# Altium PCB mppt.PcbDoc (part 5 of 6)
Units mm, origin at the board's own origin, x right, y up, seen from the top; angles counter-clockwise.
Board outline 161 x 166 mm, 6 copper layers (Top Layer, Layer 1, Layer 2, Layer 3, Layer 4, Bottom Layer), stack 0.815 mm thick; 460 components, 230 nets, 1421 pads, 2551 vias.
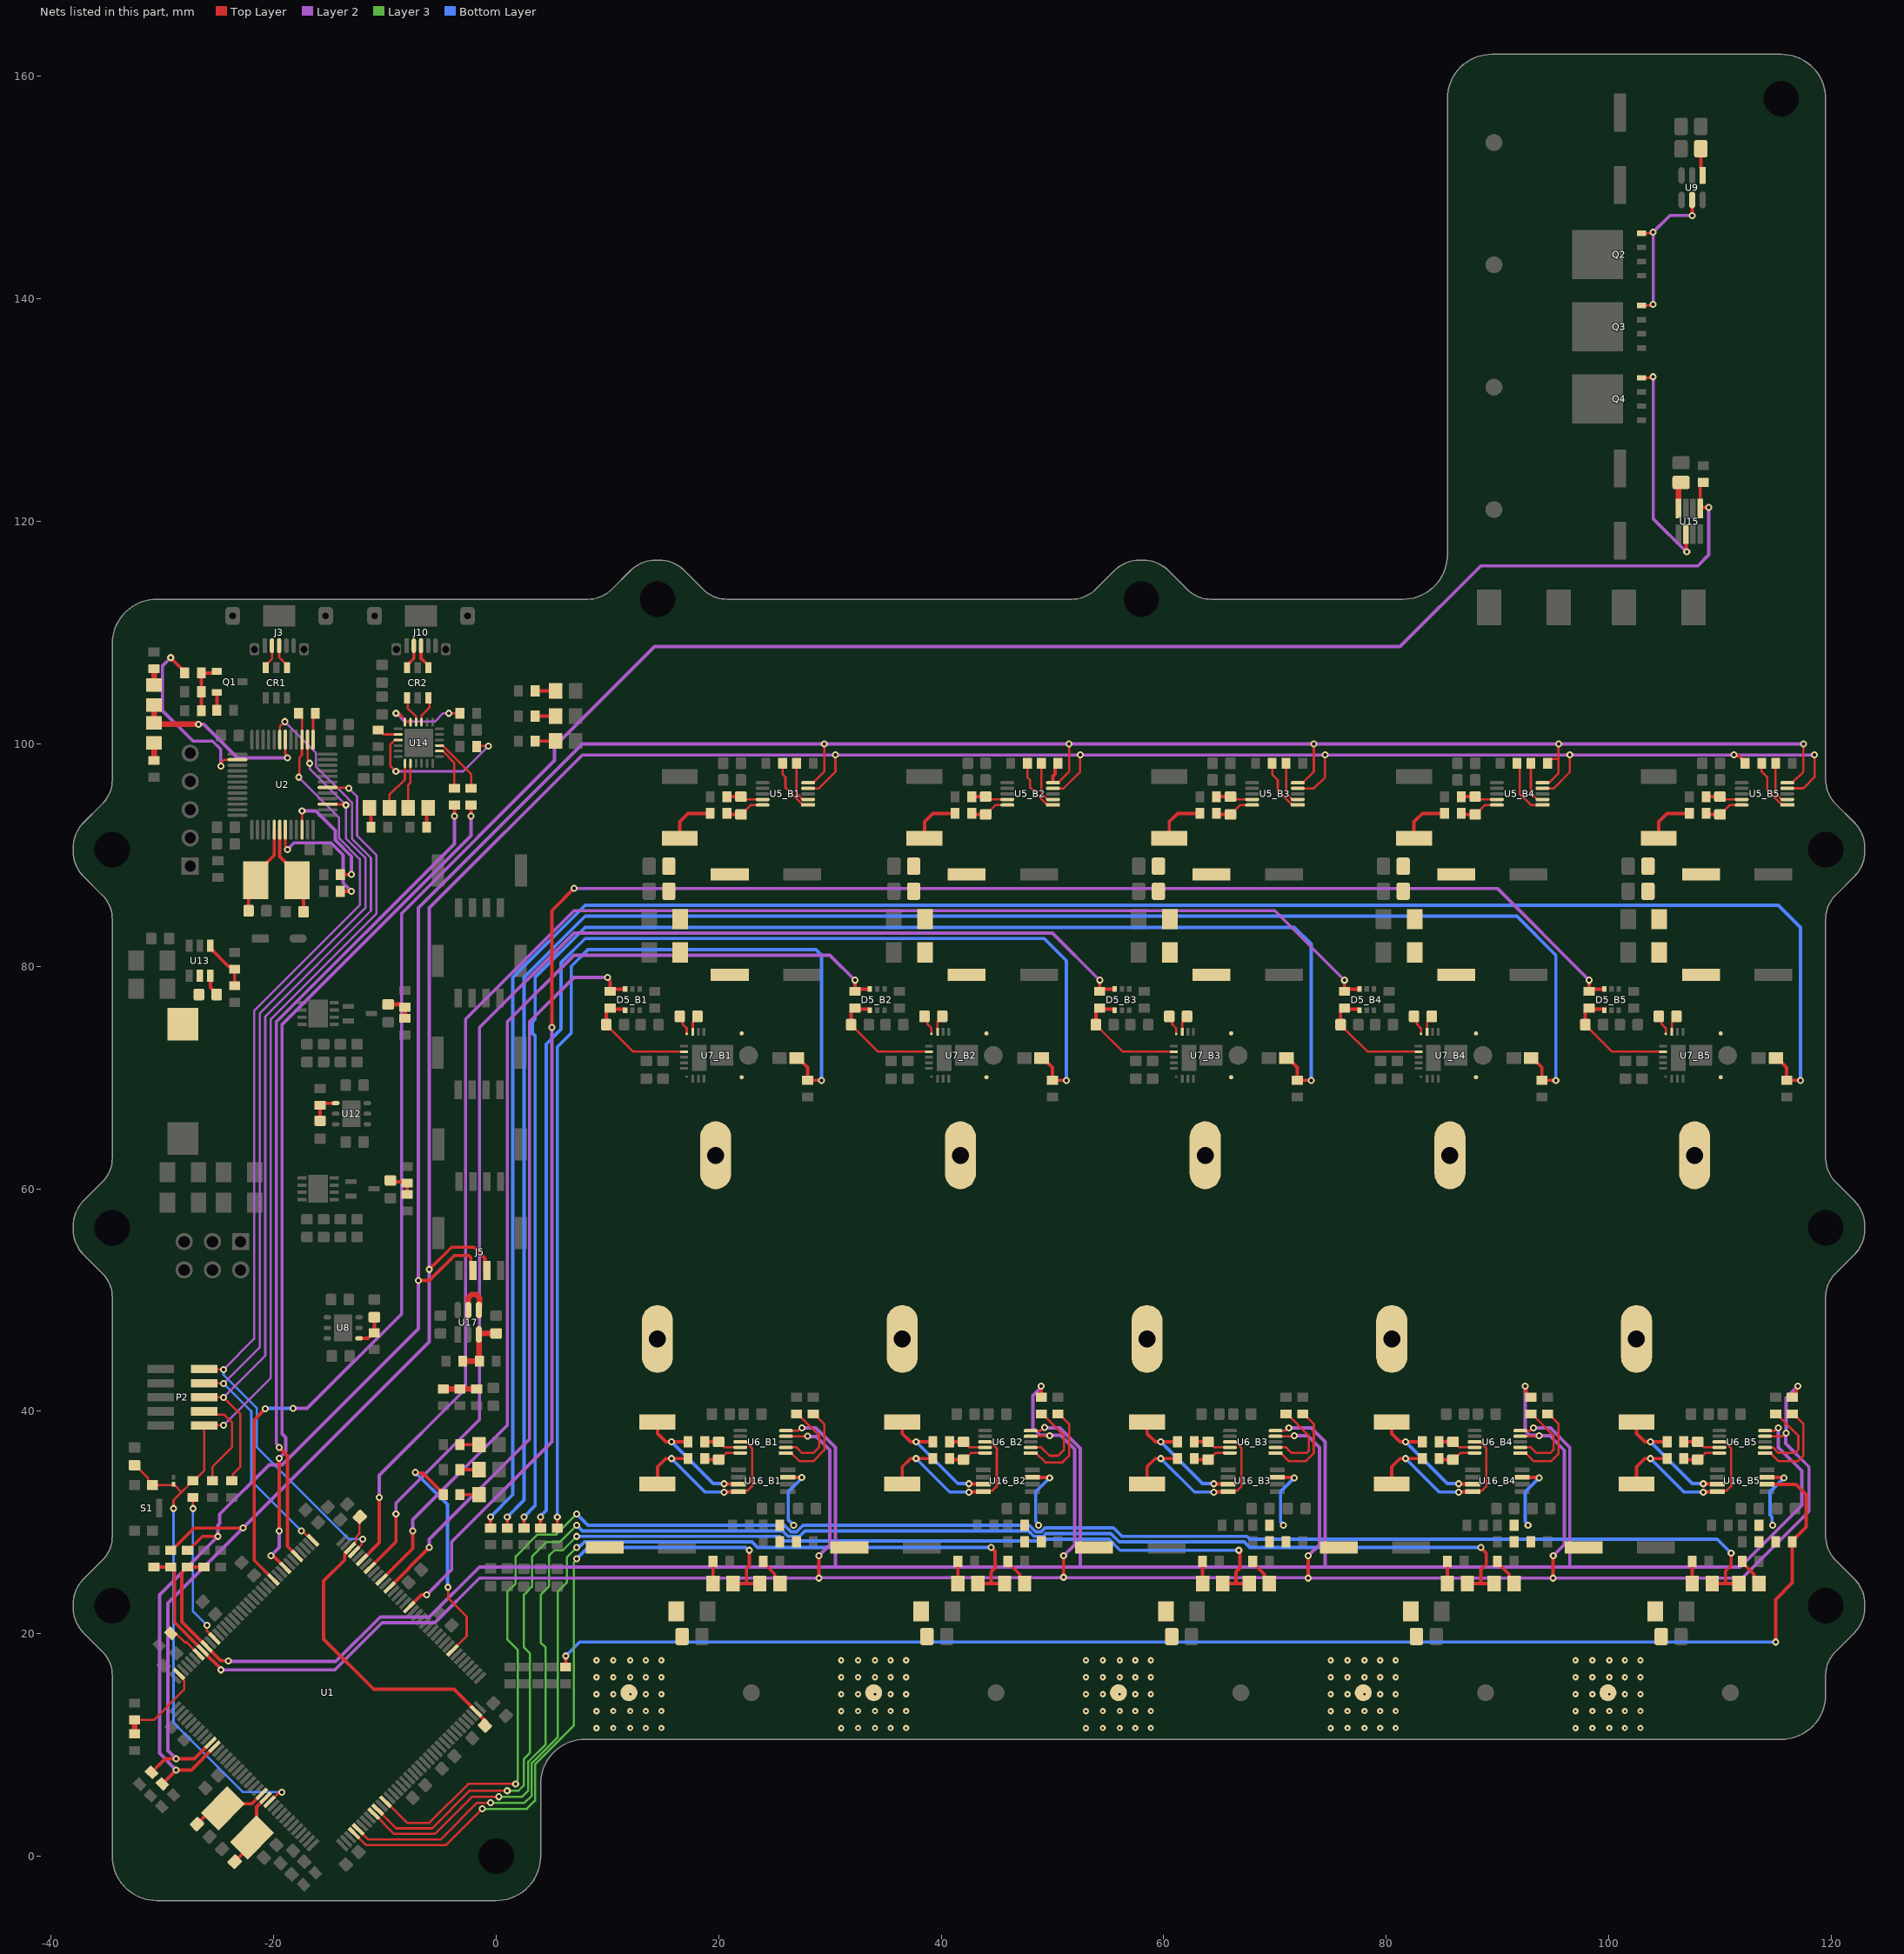
[diagram p8: the nets of this part, all layers, seen from the top]

## Via types
v1: diameter 0.635, hole 0.305, Top Layer to Bottom Layer, tented both sides, 2197 vias
v2: diameter 0.559, hole 0.203, Top Layer to Bottom Layer, tented both sides, 350 vias
v3: diameter 0.5, hole 0.2, Top Layer to Bottom Layer, 4 vias

## Nets (pads, with @x,y where several pads share a name; then routed paths per layer and width w, separated by ;. In a path a pad name is that pad's centre, name@x,y a point inside that pad or via, vN(x,y) a via of type N, cw(c..) or ccw(c..) an arc to the next point about the centre after c; other vN are vias at no path point) (continued)
I_IND_5: R20.1 R83_B5.2 U16_B5.2 | length 128.6
  Top Layer w0.3: R20.1@6.25,17 v1(6.25,18) ; U16_B5.2@114.217,33.426 114.218,33.425 116.825,33.425 117.75,32.5 117.75,29.6 116.5,28.35 R83_B5.2@116.5,28.25 116.5,24.575 115,23.075 v1(115,19.25)
  Bottom Layer w0.3: v1(6.25,18) 7.5,19.25 v1(115,19.25)
INJECT_EN: R71.2 U1.119 U15.1 | length 206.9
  Top Layer w0.3: v1@-20.75,40.25 -20.75,40.21 -21.75,39.21 -21.75,26.603 U1.119@-20.011,24.865 ; U15.1@108.225,121.25 108.225,123.225 R71.2@108.25,123.25 ; U15.1@108.25,121.25 v1(109,121.25)
  Layer 2 w0.3: v1(-18.25,40.25) -17,40.25 -8.5,48.75 -8.5,84.75 5.25,98.5 5.25,99.75 14.25,108.75 81.25,108.75 88.5,116 108,116 109,117 v1(109,121.25)
  Bottom Layer w0.3: v1@-20.75,40.25 v1(-18.25,40.25)
  other v1: -20.74,40.22
LED: D2.K D3.A U2.30 | length 16.6
  Top Layer w0.203: U2.30@-18.95,100.375 -18.95,99.067 -18.75,98.867 v1(-18.75,98.75)
  Top Layer w0.5: D3.A@-30.75,103.5 D2.K@-30.75,101.9 -30.626,101.776 -26.776,101.776 v1(-26.75,101.75)
  Layer 2 w0.3: v1(-26.75,101.75) -26.25,101.75 -23.25,98.75 v1(-18.75,98.75)
LED_TOG_1: D1_B1.K D4_B1.A U1.40 | length 63.2
  Top Layer w0.203: U1.40@-12.764,2.06 -11.703,1 -4.5,1 v1(-1.25,4.25)
  Top Layer w0.3: D4_B1.A@21.3,24.5 22.5,24.5 ; v1(22.75,27.5) 22.75,26.125 22.5,25.875 22.5,24.5 ; D1_B1.K@23.7,24.5 22.5,24.5
  Layer 3 w0.2: v1(-1.25,4.25) 2.75,4.25 3.5,5 3.5,8.25 7,11.75 7,26.415 7.25,26.665 v1(7.25,26.75)
  Bottom Layer w0.3: v1(7.25,26.75) 8.25,27.75 8.75,27.75 22.409,27.75 22.659,27.5 v1(22.75,27.5)
LED_TOG_2: D1_B2.K D4_B2.A U1.41 | length 85.3
  Top Layer w0.203: U1.41@-12.5,2.5 -11.5,1.5 -5,1.5 -1.704,4.796 -0.502,4.796 v1(-0.5,4.794)
  Top Layer w0.3: D4_B2.A@43.3,24.5 44.5,24.5 ; v1(44.5,27.75) 44.845,27.406 44.845,25.92 44.5,25.576 44.5,24.5 ; D1_B2.K@45.7,24.5 44.5,24.5
  Layer 3 w0.2: v1(-0.5,4.794) 2.544,4.794 3.198,5.448 3.198,8.375 5.544,10.721 5.544,23.795 6.346,24.596 6.346,26.846 v1(7.25,27.75)
  Bottom Layer w0.3: v1(7.25,27.75) 7.341,27.75 7.492,27.902 7.584,27.902 7.932,28.25 23,28.25 23.5,27.75 v1(44.5,27.75)
LED_TOG_3: D1_B3.K D4_B3.A U1.45 | length 107.5
  Top Layer w0.203: U1.45@-10.996,3.828 -9.168,2 -5.5,2 -2.159,5.341 0.248,5.341 v1(0.25,5.339)
  Top Layer w0.3: D4_B3.A@65.3,24.5 66.5,24.5 ; v1(66.75,27.5) 66.844,27.405 66.844,25.92 66.5,25.576 66.5,24.5 ; D1_B3.K@67.7,24.5 66.5,24.5
  Layer 3 w0.2: v1(0.25,5.339) 2.339,5.339 2.897,5.897 2.897,8.5 4.456,10.059 4.456,18.75 4,19.206 4,23.5 4.75,24.25 4.75,27 5.25,27.5 6,27.5 v1(7.25,28.75)
  Bottom Layer w0.3: v1(7.25,28.75) 25.5,28.75 25.898,28.352 49.329,28.352 49.477,28.5 55.08,28.5 56.08,27.5 v1(66.75,27.5)
LED_TOG_4: D1_B4.K D4_B4.A U1.46 | length 130.8
  Top Layer w0.203: U1.46@-10.75,4.25 -9,2.5 -5.75,2.5 -2.365,5.885 0.998,5.885 v1(1,5.883)
  Top Layer w0.3: D4_B4.A@87.3,24.5 88.5,24.5 ; v1(88.5,27.75) 89,27.25 89,26.25 88.5,25.75 88.5,24.5 ; D1_B4.K@89.7,24.5 88.5,24.5
  Layer 3 w0.2: v1(1,5.883) 2.016,5.883 2.5,6.367 2.5,8.75 3.044,9.295 3.044,18.226 2.5,18.77 2.5,23.5 3.229,24.229 3.229,26.924 4.555,28.25 5.75,28.25 v1(7.25,29.75)
  Bottom Layer w0.3: v1(7.25,29.75) 7.75,29.25 25.75,29.25 26.246,28.754 27.254,28.754 27.75,29.25 47.841,29.25 48.337,28.754 49.163,28.754 49.409,29 55.25,29 56,28.25 67.25,28.25 67.75,27.75 v1(88.5,27.75)
LED_TOG_5: D1_B5.K D4_B5.A U1.48 | length 153.7
  Top Layer w0.203: U1.48@-10,5 -8,3 -6,3 -2.5,6.5 v1(1.75,6.5)
  Top Layer w0.3: D4_B5.A@109.3,24.5 110.5,24.5 ; v1(111,27.25) 111,26.125 110.5,25.625 110.5,24.5 ; D1_B5.K@111.7,24.5 110.5,24.5
  Layer 3 w0.2: v1(1.75,6.5) 1.75,6.618 1.956,6.823 1.956,18.544 1,19.5 1,23.75 1.75,24.5 1.75,26.945 3.714,28.909 5.409,28.909 v1(7.25,30.75)
  Bottom Layer w0.3: v1(7.25,30.75) 8.25,29.75 25.909,29.75 26.504,29.155 26.996,29.155 27.591,29.75 47.909,29.75 48.504,29.155 48.996,29.155 49.341,29.5 55.5,29.5 56.25,28.75 67.5,28.75 67.75,28.5 109.75,28.5 v1(111,27.25)
LI_1: D5_B1.3 R7_B1.2 U1.96 | length 67.5
  Top Layer w0.3: U1.96@-9.582,24.158 -9.582,24.163 -6,27.745 v1(-6,27.75) ; v1(10,79) 10,78.909 10.25,78.659 R7_B1.2@10.25,77.75 10.45,77.95 D5_B1.3@11.6,77.95
  Layer 2 w0.3: v1(-6,27.75) -6,28.5 3,37.5 3,75 7,79 v1(10,79)
LI_2: D5_B2.3 R7_B2.2 U1.98 | length 91.9
  Top Layer w0.3: U1.98@-10.289,24.865 -7.5,27.653 v1(-7.5,29.25) ; v1(32.25,78.75) R7_B2.2@32.25,77.75 32.45,77.95 D5_B2.3@33.6,77.95
  Layer 2 w0.3: v1(-7.5,29.25) -7.5,30.25 1,38.75 1,75 7,81 30,81 v1(32.25,78.75)
LI_3: D5_B3.3 R7_B3.2 U1.101 | length 116.1
  Top Layer w0.3: U1.101@-11.349,25.925 -9,28.275 v1(-9,30.75) ; v1(54.25,78.75) R7_B3.2@54.25,77.75 54.45,77.95 D5_B3.3@55.6,77.95
  Layer 2 w0.3: v1(-9,30.75) -9,31.75 -1.5,39.25 -1.5,74.5 7,83 50,83 v1(54.25,78.75)
LI_4: D5_B4.3 R7_B4.2 U1.103 | length 140.5
  Top Layer w0.3: U1.103@-12.056,26.632 -10.5,28.189 v1(-10.5,32.25) ; v1(76.25,78.75) R7_B4.2@76.25,77.75 76.45,77.95 D5_B4.3@77.6,77.95
  Layer 2 w0.3: v1(-10.5,32.25) -10.5,34.25 -2.75,42 -2.75,75.25 7,85 70,85 v1(76.25,78.75)
LI_5: D5_B5.3 R7_B5.2 U1.91 | length 168.1
  Top Layer w0.3: U1.91@-7.814,22.39 -6.704,23.5 v1(-6.25,23.5) ; v1(5,74.5) 5,85 v1(7,87) ; v1(98.25,78.75) R7_B5.2@98.25,77.75 98.45,77.95 D5_B5.3@99.6,77.95
  Layer 2 w0.3: v1(-6.25,23.5) -4,25.75 -4,28.25 5,37.25 v1(5,74.5) ; v1(7,87) 90,87 v1(98.25,78.75)
LI_IN_B1: C28_B1.2 D5_B1.4 R7_B1.1 U7_B1.13 | length 11.2
  Top Layer w0.203: C28_B1.2@9.9,74.75 9.9,74.719 10.293,74.327 10.323,74.327 12.325,72.325 U7_B1.13@16.9,72.325
  Top Layer w0.3: C28_B1.2@9.9,74.75 9.9,76 10.15,76.25 R7_B1.1@10.25,76.25 10.35,76.15 11.55,76.15 11.6,76.1 D5_B1.4@11.6,76.05
LI_IN_B2: C28_B2.2 D5_B2.4 R7_B2.1 U7_B2.13 | length 11.2
  Top Layer w0.203: C28_B2.2@31.9,74.75 31.9,74.719 32.293,74.327 32.323,74.327 34.325,72.325 U7_B2.13@38.9,72.325
  Top Layer w0.3: C28_B2.2@31.9,74.75 31.9,76 32.15,76.25 R7_B2.1@32.25,76.25 32.35,76.15 33.55,76.15 33.6,76.1 D5_B2.4@33.6,76.05
LI_IN_B3: C28_B3.2 D5_B3.4 R7_B3.1 U7_B3.13 | length 11.2
  Top Layer w0.203: C28_B3.2@53.9,74.75 53.9,74.719 54.293,74.327 54.323,74.327 56.325,72.325 U7_B3.13@60.9,72.325
  Top Layer w0.3: C28_B3.2@53.9,74.75 53.9,76 54.15,76.25 R7_B3.1@54.25,76.25 54.35,76.15 55.55,76.15 55.6,76.1 D5_B3.4@55.6,76.05
LI_IN_B4: C28_B4.2 D5_B4.4 R7_B4.1 U7_B4.13 | length 11.2
  Top Layer w0.203: C28_B4.2@75.9,74.75 75.9,74.719 76.293,74.327 76.323,74.327 78.325,72.325 U7_B4.13@82.9,72.325
  Top Layer w0.3: C28_B4.2@75.9,74.75 75.9,76 76.15,76.25 R7_B4.1@76.25,76.25 76.35,76.15 77.55,76.15 77.6,76.1 D5_B4.4@77.6,76.05
LI_IN_B5: C28_B5.2 D5_B5.4 R7_B5.1 U7_B5.13 | length 11.2
  Top Layer w0.203: C28_B5.2@97.9,74.75 97.9,74.719 98.293,74.327 98.323,74.327 100.325,72.325 U7_B5.13@104.9,72.325
  Top Layer w0.3: C28_B5.2@97.9,74.75 97.9,76 98.15,76.25 R7_B5.1@98.25,76.25 98.35,76.15 99.55,76.15 99.6,76.1 D5_B5.4@99.6,76.05
NetC1_1: C1.1 C2.1 U1.71 U1.106 | length 30.3
  Top Layer w0.203: U1.106@-13.117,27.693 -13.117,27.801 -12.546,28.372 -12.546,28.726 -12.287,28.985 -12.287,30.463 C1.1@-12.25,30.5
  Top Layer w0.3: U1.106@-13.117,27.693 -13.117,27.654 -13.617,27.154 -13.617,26.633 -15.5,24.75 -15.5,19.5 -11,15 -3.783,15 U1.71@-1.803,13.021 -1.803,12.981 -1.009,12.187 C2.1@-1.009,11.741
NetC19_2: C19.2 R2.1 R3.2 | length 2.6
  Top Layer w0.381: C19.2@-9.698,76.575 -8.548,76.575 -8.298,76.325 R2.1@-8.198,76.325 R3.2@-8.198,75.325
NetC26_B1_1: C26_B1.1 U7_B1.11 | length 1.8
  Top Layer w0.203: C26_B1.1@16.5,75.5 16.75,75.25 16.75,74.811 17.125,74.436 U7_B1.11@17.125,73.925
NetC26_B1_2: C26_B1.2 U7_B1.10 | length 1.6
  Top Layer w0.203: U7_B1.10@17.675,74.1 17.675,75.001 18.1,75.426 C26_B1.2@18.1,75.5
NetC26_B2_1: C26_B2.1 U7_B2.11 | length 1.8
  Top Layer w0.203: C26_B2.1@38.5,75.5 38.75,75.25 38.75,74.811 39.125,74.436 U7_B2.11@39.125,73.925
NetC26_B2_2: C26_B2.2 U7_B2.10 | length 1.6
  Top Layer w0.203: U7_B2.10@39.675,74.1 39.675,75.001 40.1,75.426 C26_B2.2@40.1,75.5
NetC26_B3_1: C26_B3.1 U7_B3.11 | length 1.8
  Top Layer w0.203: C26_B3.1@60.5,75.5 60.75,75.25 60.75,74.811 61.125,74.436 U7_B3.11@61.125,73.925
NetC26_B3_2: C26_B3.2 U7_B3.10 | length 1.6
  Top Layer w0.203: U7_B3.10@61.675,74.1 61.675,75.001 62.1,75.426 C26_B3.2@62.1,75.5
NetC26_B4_1: C26_B4.1 U7_B4.11 | length 1.8
  Top Layer w0.203: C26_B4.1@82.5,75.5 82.75,75.25 82.75,74.811 83.125,74.436 U7_B4.11@83.125,73.925
NetC26_B4_2: C26_B4.2 U7_B4.10 | length 1.6
  Top Layer w0.203: U7_B4.10@83.675,74.1 83.675,75.001 84.1,75.426 C26_B4.2@84.1,75.5
NetC26_B5_1: C26_B5.1 U7_B5.11 | length 1.8
  Top Layer w0.203: C26_B5.1@104.5,75.5 104.75,75.25 104.75,74.811 105.125,74.436 U7_B5.11@105.125,73.925
NetC26_B5_2: C26_B5.2 U7_B5.10 | length 1.6
  Top Layer w0.203: U7_B5.10@105.675,74.1 105.675,75.001 106.1,75.426 C26_B5.2@106.1,75.5
NetC39_2: C39.2 U2.5 Y1.2 | length 8.2
  Top Layer w0.3: C39.2@-22.25,85 -22.25,87.1 Y1.2@-21.6,87.75 -21.6,88.325 -19.95,89.975 U2.5@-19.95,92.275
NetC40_1: C40.1 U2.6 Y1.1 | length 8.3
  Top Layer w0.3: U2.6@-19.45,92.275 -19.45,89.875 -17.9,88.325 Y1.1@-17.9,87.75 -17.313,87.163 C40.1@-17.313,84.9
NetC49_2: C49.2 R47.2 U8.1 | length 3
  Top Layer w0.3: U8.1@-12.325,46.55 -11.525,46.55 -11.3,46.775 -11.3,46.8 -11.05,47.05 R47.2@-10.95,47.05 C49.2@-10.95,48.45
NetC54_2: C54.2 R50.1 R51.2 | length 2.6
  Top Layer w0.3: C54.2@-9.5,60.75 -9.375,60.625 -8.125,60.625 R50.1@-8,60.5 R51.2@-8,59.5
NetC61_2: C61.2 R52.2 U12.1 | length 2.9
  Top Layer w0.3: C61.2@-15.824,66.11 R52.2@-15.824,67.51 -15.653,67.681 -14.444,67.681 U12.1@-14.425,67.7
NetC62_B1_1: C62_B1.1 R54_B1.1 U6_B1.9 | length 3.4
  Top Layer w0.203: C62_B1.1@20,37.25 20.042,37.25 20.542,36.75 U6_B1.9@21.949,36.75
  Top Layer w0.3: R54_B1.1@18.75,37.25 C62_B1.1@20,37.25
NetC62_B1_2: C62_B1.2 R53_B1.1 U6_B1.10 | length 3.5
  Top Layer w0.203: C62_B1.2@20,35.65 20.074,35.65 20.674,36.25 U6_B1.10@21.949,36.25
  Top Layer w0.3: R53_B1.1@18.75,35.75 18.85,35.65 C62_B1.2@20,35.65
NetC62_B2_1: C62_B2.1 R54_B2.1 U6_B2.9 | length 3.4
  Top Layer w0.203: C62_B2.1@42,37.25 42.042,37.25 42.542,36.75 U6_B2.9@43.949,36.75
  Top Layer w0.3: R54_B2.1@40.75,37.25 C62_B2.1@42,37.25
NetC62_B2_2: C62_B2.2 R53_B2.1 U6_B2.10 | length 3.5
  Top Layer w0.203: C62_B2.2@42,35.65 42.074,35.65 42.674,36.25 U6_B2.10@43.949,36.25
  Top Layer w0.3: R53_B2.1@40.75,35.75 40.85,35.65 C62_B2.2@42,35.65
NetC62_B3_1: C62_B3.1 R54_B3.1 U6_B3.9 | length 3.4
  Top Layer w0.203: C62_B3.1@64,37.25 64.042,37.25 64.542,36.75 U6_B3.9@65.949,36.75
  Top Layer w0.3: R54_B3.1@62.75,37.25 C62_B3.1@64,37.25
NetC62_B3_2: C62_B3.2 R53_B3.1 U6_B3.10 | length 3.5
  Top Layer w0.203: C62_B3.2@64,35.65 64.074,35.65 64.674,36.25 U6_B3.10@65.949,36.25
  Top Layer w0.3: R53_B3.1@62.75,35.75 62.85,35.65 C62_B3.2@64,35.65
NetC62_B4_1: C62_B4.1 R54_B4.1 U6_B4.9 | length 3.4
  Top Layer w0.203: C62_B4.1@86,37.25 86.042,37.25 86.542,36.75 U6_B4.9@87.949,36.75
  Top Layer w0.3: R54_B4.1@84.75,37.25 C62_B4.1@86,37.25
NetC62_B4_2: C62_B4.2 R53_B4.1 U6_B4.10 | length 3.5
  Top Layer w0.203: C62_B4.2@86,35.65 86.074,35.65 86.674,36.25 U6_B4.10@87.949,36.25
  Top Layer w0.3: R53_B4.1@84.75,35.75 84.85,35.65 C62_B4.2@86,35.65
NetC62_B5_1: C62_B5.1 R54_B5.1 U6_B5.9 | length 3.4
  Top Layer w0.203: C62_B5.1@108,37.25 108.042,37.25 108.542,36.75 U6_B5.9@109.949,36.75
  Top Layer w0.3: R54_B5.1@106.75,37.25 C62_B5.1@108,37.25
NetC62_B5_2: C62_B5.2 R53_B5.1 U6_B5.10 | length 3.5
  Top Layer w0.203: C62_B5.2@108,35.65 108.074,35.65 108.674,36.25 U6_B5.10@109.949,36.25
  Top Layer w0.3: R53_B5.1@106.75,35.75 106.85,35.65 C62_B5.2@108,35.65
NetC63_B1_1: C63_B1.1 R56_B1.1 U5_B1.9 | length 3.3
  Top Layer w0.203: C63_B1.1@22,95.25 22.24,95.01 23.939,95.01 U5_B1.9@23.949,95
  Top Layer w0.3: R56_B1.1@20.75,95.25 C63_B1.1@22,95.25
NetC63_B1_2: C63_B1.2 R55_B1.1 U5_B1.10 | length 3.6
  Top Layer w0.203: C63_B1.2@22,93.65 22.052,93.65 22.902,94.5 U5_B1.10@23.949,94.5
  Top Layer w0.3: R55_B1.1@20.75,93.75 20.85,93.65 C63_B1.2@22,93.65
NetC63_B2_1: C63_B2.1 R56_B2.1 U5_B2.9 | length 3.3
  Top Layer w0.203: C63_B2.1@44,95.25 44.24,95.01 45.939,95.01 U5_B2.9@45.949,95
  Top Layer w0.3: R56_B2.1@42.75,95.25 C63_B2.1@44,95.25
NetC63_B2_2: C63_B2.2 R55_B2.1 U5_B2.10 | length 3.6
  Top Layer w0.203: C63_B2.2@44,93.65 44.052,93.65 44.902,94.5 U5_B2.10@45.949,94.5
  Top Layer w0.3: R55_B2.1@42.75,93.75 42.85,93.65 C63_B2.2@44,93.65
NetC63_B3_1: C63_B3.1 R56_B3.1 U5_B3.9 | length 3.3
  Top Layer w0.203: C63_B3.1@66,95.25 66.24,95.01 67.939,95.01 U5_B3.9@67.949,95
  Top Layer w0.3: R56_B3.1@64.75,95.25 C63_B3.1@66,95.25
NetC63_B3_2: C63_B3.2 R55_B3.1 U5_B3.10 | length 3.6
  Top Layer w0.203: C63_B3.2@66,93.65 66.052,93.65 66.902,94.5 U5_B3.10@67.949,94.5
  Top Layer w0.3: R55_B3.1@64.75,93.75 64.85,93.65 C63_B3.2@66,93.65
NetC63_B4_1: C63_B4.1 R56_B4.1 U5_B4.9 | length 3.3
  Top Layer w0.203: C63_B4.1@88,95.25 88.24,95.01 89.939,95.01 U5_B4.9@89.949,95
  Top Layer w0.3: R56_B4.1@86.75,95.25 C63_B4.1@88,95.25
NetC63_B4_2: C63_B4.2 R55_B4.1 U5_B4.10 | length 3.6
  Top Layer w0.203: C63_B4.2@88,93.65 88.052,93.65 88.902,94.5 U5_B4.10@89.949,94.5
  Top Layer w0.3: R55_B4.1@86.75,93.75 86.85,93.65 C63_B4.2@88,93.65
NetC63_B5_1: C63_B5.1 R56_B5.1 U5_B5.9 | length 3.3
  Top Layer w0.203: C63_B5.1@110,95.25 110.24,95.01 111.939,95.01 U5_B5.9@111.949,95
  Top Layer w0.3: R56_B5.1@108.75,95.25 C63_B5.1@110,95.25
NetC63_B5_2: C63_B5.2 R55_B5.1 U5_B5.10 | length 3.6
  Top Layer w0.203: C63_B5.2@110,93.65 110.052,93.65 110.902,94.5 U5_B5.10@111.949,94.5
  Top Layer w0.3: R55_B5.1@108.75,93.75 108.85,93.65 C63_B5.2@110,93.65
NetC66_1: C66.1 U9.1 | length 2.5
  Top Layer w0.3: C66.1@108.278,153.5 108.278,151.74 108.45,151.568 U9.1@108.45,151.1
NetC68_1: C68.1 U13.6 | length 1.9
  Top Layer w0.3: U13.6@-25.686,79.162 -25.686,78.09 -25.112,77.517 C68.1@-25.112,77.464
NetC68_2: C68.2 L2.1 U13.5
NetC85_1: C85.1 U15.4 | length 2.2
  Top Layer w0.5: U15.4@106.275,121.151 106.275,122.997 C85.1@106.5,123.222
NetC93_2: C93.2 R31.1 R94.2 U17.3 | length 5.6
  Top Layer w0.5: R31.1@-3,44.5 R94.2@-1.5,44.5 -1.537,44.537 -1.537,46.886 U17.3@-1.55,46.9 -1.55,46.968 -1.518,47 C93.2@0,47
NetCR1_4: CR1.4 J3.3 | length 2.2
  Top Layer w0.203: J3.3@-19.5,108.825 -19.5,107.775 -18.8,107.075 CR1.4@-18.8,106.865
NetCR1_6: CR1.6 J3.2 | length 2.2
  Top Layer w0.203: CR1.6@-20.7,106.865 -20.7,107.075 -20.15,107.625 J3.2@-20.15,108.825
NetCR2_1: CR2.1 U14.4 | length 2.5
  Top Layer w0.203: CR2.1@-8,104.135 -7.96,104.095 -7.96,103.21 -7.2,102.45 U14.4@-7.2,101.951
NetCR2_3: CR2.3 U14.3 | length 2.6
  Top Layer w0.203: U14.3@-6.7,101.951 -6.7,102.55 -6,103.25 CR2.3@-6,104.25
NetCR2_4: CR2.4 J10.3 | length 2.2
  Top Layer w0.3: J10.3@-6.75,108.825 -6.75,107.7 -6.254,107.204 -6.229,107.204 -6.1,107.075 CR2.4@-6.1,106.865
NetCR2_6: CR2.6 J10.2 | length 2.2
  Top Layer w0.3: CR2.6@-8,106.865 -8,107.075 -7.4,107.675 J10.2@-7.4,108.825
NetD1_B1_A: D1_B1.A R45_B1.2 | length 2.6
  Top Layer w0.3: R45_B1.2@24,26.5 24,26.4 25.05,25.35 25.05,24.95 D1_B1.A@25.5,24.5
NetD1_B2_A: D1_B2.A R45_B2.2 | length 2.6
  Top Layer w0.3: R45_B2.2@46,26.5 46,26.4 47.05,25.35 47.05,24.95 D1_B2.A@47.5,24.5
NetD1_B3_A: D1_B3.A R45_B3.2 | length 2.6
  Top Layer w0.3: R45_B3.2@68,26.5 68,26.4 69.05,25.35 69.05,24.95 D1_B3.A@69.5,24.5
NetD1_B4_A: D1_B4.A R45_B4.2 | length 2.6
  Top Layer w0.3: R45_B4.2@90,26.5 90,26.4 91.05,25.35 91.05,24.95 D1_B4.A@91.5,24.5
NetD1_B5_A: D1_B5.A R45_B5.2 | length 2.6
  Top Layer w0.3: R45_B5.2@112,26.5 112,26.4 113.05,25.35 113.05,24.95 D1_B5.A@113.5,24.5
NetD2_A: D2.A R43.2 | length 1.6
  Top Layer w0.5: R43.2@-30.75,98.5 D2.A@-30.75,100.1
NetD3_K: D3.K R44.1 | length 1.4
  Top Layer w0.5: D3.K@-30.75,105.3 R44.1@-30.75,106.75
NetD4_B1_K: D4_B1.K R46_B1.1 | length 2
  Top Layer w0.3: D4_B1.K@19.5,24.5 R46_B1.1@19.5,26.5
NetD4_B2_K: D4_B2.K R46_B2.1 | length 2
  Top Layer w0.3: D4_B2.K@41.5,24.5 R46_B2.1@41.5,26.5
NetD4_B3_K: D4_B3.K R46_B3.1 | length 2
  Top Layer w0.3: D4_B3.K@63.5,24.5 R46_B3.1@63.5,26.5
NetD4_B4_K: D4_B4.K R46_B4.1 | length 2
  Top Layer w0.3: D4_B4.K@85.5,24.5 R46_B4.1@85.5,26.5
NetD4_B5_K: D4_B5.K R46_B5.1 | length 2
  Top Layer w0.3: D4_B5.K@107.5,24.5 R46_B5.1@107.5,26.5
NetD6_A: D6.A R63.1 | length 1.8
  Top Layer w0.3: R63.1@-6.25,92.5 -6.25,94.1 D6.A@-6.1,94.25
NetD6_K: D6.K U14.14 | length 4.1
  Top Layer w0.203: D6.K@-7.9,94.25 -7.9,96.301 -7.7,96.501 U14.14@-7.7,98.249
NetD7_A: D7.A R64.1 | length 1.8
  Top Layer w0.3: D7.A@-11.4,94.25 -11.25,94.1 R64.1@-11.25,92.5
NetD7_K: D7.K U14.13 | length 4.6
  Top Layer w0.203: D7.K@-9.6,94.25 -9.6,95.4 -8.2,96.8 U14.13@-8.2,98.249
NetD9_A: D9.A R68.2 | length 2
  Top Layer w0.3: R68.2@3.5,102.5 D9.A@5.5,102.5
NetD10_A: D10.A R69.2 | length 2
  Top Layer w0.3: R69.2@3.5,104.75 D10.A@5.5,104.75
NetD11_A: D11.A R70.2 | length 1.8
  Top Layer w0.3: R70.2@3.5,100.25 D11.A@5.25,100.25
NetD12_A: D12.A R75.2 | length 1.7
  Top Layer w0.3: R75.2@-3.25,37 D12.A@-1.55,37
NetD13_A: D13.A R76.1 | length 1.8
  Top Layer w0.3: R76.1@-3.25,34.75 D13.A@-1.5,34.75
NetD14_A: D14.A R77.2 | length 1.7
  Top Layer w0.3: R77.2@-3.25,32.5 D14.A@-1.55,32.5
NetL1_B1_1: L1_B1.1 U7_B1.5
NetL1_B1_2: L1_B1.2 R4_B1.2 R54_B1.2 U16_B1.7 | length 11.7
  Top Layer w0.3: R4_B1.2@14.5,39.031 14.5,38 15.25,37.25 v1(15.75,37.25) R54_B1.2@17.25,37.25 ; v1(20.5,33.48) 20.528,33.453 21.756,33.453 U16_B1.7@21.784,33.425
  Bottom Layer w0.3: v1(15.75,37.25) 19.5,33.5 20.481,33.5 v1(20.5,33.48)
NetL1_B2_1: L1_B2.1 U7_B2.5
NetL1_B2_2: L1_B2.2 R4_B2.2 R54_B2.2 U16_B2.7 | length 11.7
  Top Layer w0.3: R4_B2.2@36.5,39.031 36.5,38 37.25,37.25 v1(37.75,37.25) R54_B2.2@39.25,37.25 ; v1(42.5,33.48) 42.528,33.453 43.756,33.453 U16_B2.7@43.784,33.425
  Bottom Layer w0.3: v1(37.75,37.25) 41.5,33.5 42.481,33.5 v1(42.5,33.48)
NetL1_B3_1: L1_B3.1 U7_B3.5
NetL1_B3_2: L1_B3.2 R4_B3.2 R54_B3.2 U16_B3.7 | length 11.7
  Top Layer w0.3: R4_B3.2@58.5,39.031 58.5,38 59.25,37.25 v1(59.75,37.25) R54_B3.2@61.25,37.25 ; v1(64.5,33.48) 64.528,33.453 65.756,33.453 U16_B3.7@65.784,33.425
  Bottom Layer w0.3: v1(59.75,37.25) 63.5,33.5 64.481,33.5 v1(64.5,33.48)
NetL1_B4_1: L1_B4.1 U7_B4.5
NetL1_B4_2: L1_B4.2 R4_B4.2 R54_B4.2 U16_B4.7 | length 11.7
  Top Layer w0.3: R4_B4.2@80.5,39.031 80.5,38 81.25,37.25 v1(81.75,37.25) R54_B4.2@83.25,37.25 ; v1(86.5,33.48) 86.528,33.453 87.756,33.453 U16_B4.7@87.784,33.425
  Bottom Layer w0.3: v1(81.75,37.25) 85.5,33.5 86.481,33.5 v1(86.5,33.48)
NetL1_B5_1: L1_B5.1 U7_B5.5
NetL1_B5_2: L1_B5.2 R4_B5.2 R54_B5.2 U16_B5.7 | length 11.7
  Top Layer w0.3: R4_B5.2@102.5,39.031 102.5,38 103.25,37.25 v1(103.75,37.25) R54_B5.2@105.25,37.25 ; v1(108.5,33.48) 108.528,33.453 109.756,33.453 U16_B5.7@109.784,33.425
  Bottom Layer w0.3: v1(103.75,37.25) 107.5,33.5 108.481,33.5 v1(108.5,33.48)
NetQ1_1: Q1.1 R39.2 R40.2 R41.1 | length 4.9
  Top Layer w0.3: R39.2@-26.5,102.975 R41.1@-26.5,104.675 R40.2@-26.5,106.375 -25.65,106.375 -25.25,106.375 Q1.1@-25.1,106.525
NetQ1_2: Q1.2 R42.2 | length 1.6
  Top Layer w0.3: R42.2@-25.1,103.025 Q1.2@-25.1,104.625
NetQ2_4: Q2.4 Q3.4 U9.5 | length 14.1
  Top Layer w0.203: Q3.4@102.95,139.405 v1@103.905,139.405 ; Q2.4@102.95,145.905 103.905,145.905 ccw(c103.905,146) v1(104,146)
  Top Layer w0.3: v1(107.5,147.5) U9.5@107.5,148.9
  Layer 2 w0.3: v1(104,139.5) v1(104,146) 105.5,147.5 v1(107.5,147.5)
NetQ4_4: Q4.4 U15.6 | length 19.7
  Top Layer w0.203: Q4.4@102.95,132.905 103.905,132.905 ccw(c103.905,133) v1(104,133)
  Top Layer w0.3: U15.6@106.925,118.849 106.97,118.804 106.97,117.318 v1(107.015,117.273)
  Layer 2 w0.3: v1(104,133) 104,120.25 v1@107,117.25
NetR8_1: R8.1 R30.2 U13.1 | length 4.7
  Top Layer w0.3: U13.1@-25.686,81.862 -25.686,81.612 -24.074,80 -23.75,80 R30.2@-23.5,79.75 R8.1@-23.5,78.25
NetR11_B1_1: R11_B1.1 U5_B1.2 | length 4
  Top Layer w0.203: R11_B1.1@27,98.25 27,95.571 27.571,95 U5_B1.2@28.051,95
NetR11_B2_1: R11_B2.1 U5_B2.2 | length 4
  Top Layer w0.203: R11_B2.1@49,98.25 49,95.571 49.571,95 U5_B2.2@50.051,95
NetR11_B3_1: R11_B3.1 U5_B3.2 | length 4
  Top Layer w0.203: R11_B3.1@71,98.25 71,95.571 71.571,95 U5_B3.2@72.051,95
NetR11_B4_1: R11_B4.1 U5_B4.2 | length 4
  Top Layer w0.203: R11_B4.1@93,98.25 93,95.571 93.571,95 U5_B4.2@94.051,95
NetR11_B5_1: R11_B5.1 U5_B5.2 | length 4
  Top Layer w0.203: R11_B5.1@115,98.25 115,95.571 115.571,95 U5_B5.2@116.051,95
NetR12_B1_2: R12_B1.2 U6_B1.2 | length 7.3
  Top Layer w0.203: U6_B1.2@26.051,36.75 27,36.75 27.5,36.25 28.522,36.25 29.046,36.774 29.046,37.804 27.1,39.75 R12_B1.2@27,39.75
NetR12_B2_2: R12_B2.2 U6_B2.2 | length 7.6
  Top Layer w0.203: U6_B2.2@48.051,36.75 49,36.75 49.75,36 50.5,36 51.046,36.546 51.046,37.804 49.1,39.75 R12_B2.2@49,39.75
NetR12_B3_2: R12_B3.2 U6_B3.2 | length 7.5
  Top Layer w0.203: U6_B3.2@70.051,36.75 71,36.75 71.5,36.25 72.881,36.25 73.046,36.415 73.046,37.804 71.1,39.75 R12_B3.2@71,39.75
NetR12_B4_2: R12_B4.2 U6_B4.2 | length 7.4
  Top Layer w0.203: U6_B4.2@92.051,36.75 93,36.75 93.5,36.25 94.75,36.25 95.046,36.546 95.046,37.804 93.1,39.75 R12_B4.2@93,39.75
NetR12_B5_2: R12_B5.2 U6_B5.2 | length 7.4
  Top Layer w0.203: U6_B5.2@114.051,36.75 114.06,36.741 114.759,36.741 115.25,36.25 116.75,36.25 117.046,36.546 117.046,37.804 115.1,39.75 R12_B5.2@115,39.75
NetR13_B1_1: R13_B1.1 U5_B1.1 | length 5
  Top Layer w0.203: R13_B1.1@25.75,98.25 25.75,97.25 26,97 26,96.071 27.43,94.641 27.438,94.641 27.579,94.5 U5_B1.1@28.051,94.5
NetR13_B2_1: R13_B2.1 U5_B2.1 | length 5
  Top Layer w0.203: R13_B2.1@47.75,98.25 47.75,97 48,96.75 48,96.071 49.43,94.641 49.438,94.641 49.579,94.5 U5_B2.1@50.051,94.5
NetR13_B3_1: R13_B3.1 U5_B3.1 | length 5
  Top Layer w0.203: R13_B3.1@69.75,98.25 69.75,97.25 70.25,96.75 70.25,95.821 71.43,94.641 71.438,94.641 71.579,94.5 U5_B3.1@72.051,94.5
NetR13_B4_1: R13_B4.1 U5_B4.1 | length 5.3
  Top Layer w0.203: R13_B4.1@91.75,98.25 92,98 92,95.5 93,94.5 U5_B4.1@94.051,94.5
NetR13_B5_1: R13_B5.1 U5_B5.1 | length 5
  Top Layer w0.203: R13_B5.1@113.75,98.25 113.75,97.5 114.25,97 114.25,95.821 115.43,94.641 115.438,94.641 115.579,94.5 U5_B5.1@116.051,94.5
NetR32_1: R32.1 R92.1 R93.2 | length 3
  Top Layer w0.5: R32.1@-4.75,42 R93.2@-3.25,42 R92.1@-1.75,42
NetR35_1: R35.1 U2.10 | length 11
  Top Layer w0.203: U2.10@-17.45,92.275 v1@-17.45,93.95
  Top Layer w0.3: R35.1@-14,88.25 v1(-13,88.25)
  Layer 2 w0.3: v1(-17.45,93.975) -16.225,93.975 -14.463,92.213 -14.463,91.351 -13,89.888 v1(-13,88.25)
NetR36_1: R36.1 U2.25 | length 2.5
  Top Layer w0.203: U2.25@-16.45,100.375 -16.45,102.55 R36.1@-16.25,102.75
NetR38_1: R38.1 U2.7 | length 12.1
  Top Layer w0.203: U2.7@-18.95,92.275 -18.95,90.817 -18.75,90.617 v1(-18.75,90.5)
  Top Layer w0.3: R38.1@-14,86.75 v1(-13,86.75)
  Layer 2 w0.3: v1(-18.75,90.5) -18.156,91.094 -14.844,91.094 -13.75,90 -13.75,87.5 v1(-13,86.75)
NetR58_2: R58.2 U14.5 U14.6 | length 8.2
  Top Layer w0.203: v1(-9,102.75) -8.917,102.667 -8.631,102.667 -8.2,102.236 U14.6@-8.2,101.951 U14.5@-7.7,101.951 ; v1(-4.25,102.75) R58.2@-3.25,102.75
  Layer 2 w0.203: v1(-9,102.75) -8.25,102 -5.5,102 -4.75,102.75 v1(-4.25,102.75)
NetR59_2: R59.2 U14.20 | length 4.1
  Top Layer w0.203: U14.20@-5.099,99.35 -4.814,99.35 -3.75,98.286 R59.2@-3.75,96
NetR60_2: R60.2 U14.21 | length 5.2
  Top Layer w0.203: U14.21@-5.099,99.85 -4.814,99.85 -2.25,97.286 R60.2@-2.25,96
NetR61_1: R61.1 U14.8 | length 2
  Top Layer w0.203: R61.1@-10.6,101.25 -10.5,101.25 -10.1,100.85 U14.8@-8.801,100.85
NetR62_2: R62.2 U14.9 | length 13.8
  Top Layer w0.203: v1@-9,97.5 -9.5,98 -9.5,99.936 -9.086,100.35 U14.9@-8.801,100.35 ; R62.2@-1.75,99.75 -1.7,99.8 v1(-0.7,99.8)
  Layer 2 w0.203: v1(-9,97.525) -2.975,97.525 v1(-0.7,99.8)
NetR65_1: R65.1 U1.138 | length 3.2
  Top Layer w0.203: R65.1@-29.22,20.03 -28.798,20.03 -27.996,19.229 -27.81,19.229 -26.832,18.25 U1.138@-26.75,18.25
NetR66_2: R66.2 R67.1 U1.143 | length 8.4
  Top Layer w0.203: R67.1@-32.5,12.25 -30.75,12.25 -28.045,14.955 -28.045,15.82 -28.497,16.272 U1.143@-28.497,16.379
  Top Layer w0.5: R66.2@-32.5,11 R67.1@-32.5,12.25
NetR82_1: R82.1 U1.134 | length 13.5
  Top Layer w0.203: v1(-27.25,31.25) R82.1@-27.25,32.25 ; v1(-26,20.75) -26,20.247 U1.134@-25.315,19.561
  Bottom Layer w0.203: v1(-27.25,31.25) -27.25,22 v1(-26,20.75)
NetR83_B1_1: R83_B1.1 R84_B1.2 R85_B1.2 U16_B1.3 | length 6.3
  Top Layer w0.3: U16_B1.3@26.216,34.075 26.238,34.053 27.447,34.053 v1(27.468,34.032)
  Bottom Layer w0.3: v1(26.75,29.75) 26.25,30.25 26.25,32.75 27.468,33.968 v1(27.468,34.032)
NetR83_B2_1: R83_B2.1 R84_B2.2 R85_B2.2 U16_B2.3 | length 6.4
  Top Layer w0.3: U16_B2.3@48.216,34.075 48.243,34.048 49.723,34.048 v1(49.75,34.02)
  Bottom Layer w0.3: v1(48.75,29.75) 48.75,29.841 48.5,30.091 48.5,32.77 v1(49.75,34.02)
NetR83_B3_1: R83_B3.1 R84_B3.2 R85_B3.2 U16_B3.3 | length 6.4
  Top Layer w0.3: U16_B3.3@70.216,34.075 70.243,34.048 71.723,34.048 v1(71.75,34.02)
  Bottom Layer w0.3: v1(70.75,29.75) 70.75,29.841 70.5,30.091 70.5,32.77 v1(71.75,34.02)
NetR83_B4_1: R83_B4.1 R84_B4.2 R85_B4.2 U16_B4.3 | length 6.4
  Top Layer w0.3: U16_B4.3@92.216,34.075 92.243,34.048 93.723,34.048 v1(93.75,34.02)
  Bottom Layer w0.3: v1(92.75,29.75) 92.75,29.841 92.5,30.091 92.5,32.77 v1(93.75,34.02)
NetR83_B5_1: R83_B5.1 R84_B5.2 R85_B5.2 U16_B5.3 | length 6.4
  Top Layer w0.3: U16_B5.3@114.216,34.075 114.243,34.048 115.723,34.048 v1(115.75,34.02)
  Bottom Layer w0.3: v1(114.742,29.758) 114.678,29.822 114.678,30.498 114.5,30.676 114.5,32.77 v1(115.75,34.02)
NetR86_B1_2: R86_B1.2 U6_B1.1 | length 7.9
  Top Layer w0.203: U6_B1.1@26.051,36.25 26.523,36.25 27.273,35.5 28.5,35.5 29.5,36.5 29.5,38.85 28.6,39.75 R86_B1.2@28.5,39.75
NetR86_B2_2: R86_B2.2 U6_B2.1 | length 8.3
  Top Layer w0.203: U6_B2.1@48.051,36.25 48.523,36.25 49.369,35.404 50.904,35.404 51.5,36 51.5,38.85 50.6,39.75 R86_B2.2@50.5,39.75
NetR86_B3_2: R86_B3.2 U6_B3.1 | length 8
  Top Layer w0.203: U6_B3.1@70.051,36.25 70.523,36.25 71.273,35.5 72.75,35.5 73.5,36.25 73.5,38.85 72.6,39.75 R86_B3.2@72.5,39.75
NetR86_B4_2: R86_B4.2 U6_B4.1 | length 8.1
  Top Layer w0.203: U6_B4.1@92.051,36.25 92.523,36.25 93.273,35.5 94.812,35.5 95.5,36.188 95.5,38.85 94.6,39.75 R86_B4.2@94.5,39.75
NetR86_B5_2: R86_B5.2 U6_B5.1 | length 8.2
  Top Layer w0.203: U6_B5.1@114.051,36.25 114.523,36.25 115.273,35.5 117,35.5 117.5,36 117.5,38.85 116.6,39.75 R86_B5.2@116.5,39.75
NetU17_4: U17.4 U17.5 | length 3.3
  Top Layer w0.5: U17.5@-2.5,49.1 -2.5,50.207 -2.207,50.5 -1.793,50.5 -1.5,50.207 U17.4@-1.5,49.25
NTC_1: R9_B1.1 R21.1 R34_B1.2 | length 89.3
  Top Layer w0.3: R21.1@5.5,29.5 v1(5.5,30.5) ; R34_B1.2@27.026,71.75 27.15,71.75 28,70.9 R9_B1.1@28,69.75 v1(29.25,69.75)
  Bottom Layer w0.3: v1(5.5,30.5) 5.5,72.75 6.75,74 6.75,80 8.25,81.5 28.75,81.5 29.25,81 v1(29.25,69.75)
NTC_2: R9_B2.1 R22.1 R34_B2.2 | length 113.2
  Top Layer w0.3: R22.1@4,29.5 v1(4,30.5) ; R34_B2.2@49.026,71.75 49.15,71.75 50,70.9 R9_B2.1@50,69.75 v1(51.25,69.75)
  Bottom Layer w0.3: v1(4,30.5) 4,30.585 4.5,31.085 4.5,73 5.838,74.338 5.838,80.338 8,82.5 49.25,82.5 51.25,80.5 v1(51.25,69.75)
NTC_3: R9_B3.1 R23.1 R34_B3.2 | length 138.3
  Top Layer w0.3: R23.1@2.5,29.5 v1(2.5,30.5) ; R34_B3.2@71.026,71.75 71.15,71.75 72,70.9 R9_B3.1@72,69.75 v1(73.25,69.75)
  Bottom Layer w0.3: v1(2.5,30.5) 3.5,31.5 3.5,73.75 3.25,74 3.25,75 3.5,75.25 3.5,79 8,83.5 71.75,83.5 73.25,82 v1(73.25,69.75)
NTC_4: R9_B4.1 R24.1 R34_B4.2 | length 161.6
  Top Layer w0.3: R24.1@1,29.5 v1(1,30.5) ; R34_B4.2@93.026,71.75 93.15,71.75 94,70.9 R9_B4.1@94,69.75 v1(95.25,69.75)
  Bottom Layer w0.3: v1(1,30.5) 2.5,32 2.5,79 8,84.5 91.75,84.5 95.25,81 v1(95.25,69.75)
NTC_5: R9_B5.1 R25.1 R34_B5.2 | length 187.1
  Top Layer w0.3: R25.1@-0.5,29.5 v1(-0.5,30.5) ; R34_B5.2@115.026,71.75 115.15,71.75 116,70.9 R9_B5.1@116,69.75 v1(117.25,69.75)
  Bottom Layer w0.3: v1(-0.5,30.5) 1.5,32.5 1.5,79 8,85.5 115.25,85.5 117.25,83.5 v1(117.25,69.75)
OSC_IN: C77.2 U1.23 Y2.2 | length 6.9
  Top Layer w0.3: C77.2@-26.881,2.881 -25.455,4.308 Y2.2@-24.558,4.308 -24.152,4.715 -21.953,4.715 U1.23@-21.072,5.596
OSC_OUT: C78.2 U1.24 Y2.1 | length 6.9
  Top Layer w0.3: C78.2@-23.5,-0.5 -21.942,1.058 Y2.1@-21.942,1.692 -21.535,2.098 -21.535,4.426 U1.24@-20.718,5.242
OUTPUT_CONNECTED: R77.1 U1.80 | length 21.9
  Top Layer w0.203: v1(-4.328,24.172) -4.328,23.2 -2.654,21.526 -2.654,19.771 U1.80@-3.925,18.501 U1.80@-4,18.5
  Top Layer w0.3: v1(-7.25,34.5) -7.186,34.436 -6.586,34.436 -4.75,32.6 R77.1@-4.75,32.5
  Bottom Layer w0.3: v1(-7.25,34.5) -4.383,31.633 -4.383,24.228 v1(-4.328,24.172)
PV_IN_B1: C35_B1.2 C36_B1.1 C37_B1.2 R4_B1.1 R53_B1.2 SP1_B1.SP U6_B1.8 U16_B1.8 | length 18
  Top Layer w0.203: U16_B1.8@21.784,32.775 21.867,32.858 22.608,32.858 23,33.25 23,36.679 22.429,37.25 U6_B1.8@21.949,37.25
  Top Layer w0.3: R4_B1.1@14.5,33.469 14.5,35 15.25,35.75 v1(15.75,35.75) R53_B1.2@17.25,35.75 ; v1(20.5,32.718) 20.528,32.747 21.756,32.747 U16_B1.8@21.784,32.775
  Bottom Layer w0.3: v1(15.75,35.75) 18.762,32.738 20.481,32.738 v1(20.5,32.718)
  other v2: 9.016,11.516 10.531,11.518 12.055,11.518 13.452,11.518 14.849,11.518 9.016,13.04 10.531,13.042 12.055,13.042 13.452,13.042 14.849,13.042 9.016,14.564 10.531,14.566 12.055,14.566 13.452,14.566 14.849,14.566 9.016,16.088 10.531,16.09 12.055,16.09 13.452,16.09 14.849,16.09 9.016,17.612 10.531,17.614 12.055,17.614 13.452,17.614 14.849,17.614
PV_IN_B2: C35_B2.2 C36_B2.1 C37_B2.2 R4_B2.1 R53_B2.2 SP1_B2.SP U6_B2.8 U16_B2.8 | length 18
  Top Layer w0.203: U16_B2.8@43.784,32.775 43.867,32.858 44.608,32.858 45,33.25 45,36.679 44.429,37.25 U6_B2.8@43.949,37.25
  Top Layer w0.3: R4_B2.1@36.5,33.469 36.5,35 37.25,35.75 v1(37.75,35.75) R53_B2.2@39.25,35.75 ; v1(42.5,32.718) 42.528,32.747 43.756,32.747 U16_B2.8@43.784,32.775
  Bottom Layer w0.3: v1(37.75,35.75) 40.762,32.738 42.481,32.738 v1(42.5,32.718)
  other v2: 31.016,11.516 32.531,11.518 34.055,11.518 35.452,11.518 36.849,11.518 31.016,13.04 32.531,13.042 34.055,13.042 35.452,13.042 36.849,13.042 31.016,14.564 32.531,14.566 34.055,14.566 35.452,14.566 36.849,14.566 31.016,16.088 32.531,16.09 34.055,16.09 35.452,16.09 36.849,16.09 31.016,17.612 32.531,17.614 34.055,17.614 35.452,17.614 36.849,17.614
PV_IN_B3: C35_B3.2 C36_B3.1 C37_B3.2 R4_B3.1 R53_B3.2 SP1_B3.SP U6_B3.8 U16_B3.8 | length 18
  Top Layer w0.203: U16_B3.8@65.784,32.775 65.867,32.858 66.608,32.858 67,33.25 67,36.679 66.429,37.25 U6_B3.8@65.949,37.25
  Top Layer w0.3: R4_B3.1@58.5,33.469 58.5,35 59.25,35.75 v1(59.75,35.75) R53_B3.2@61.25,35.75 ; v1(64.5,32.718) 64.528,32.747 65.756,32.747 U16_B3.8@65.784,32.775
  Bottom Layer w0.3: v1(59.75,35.75) 62.762,32.738 64.481,32.738 v1(64.5,32.718)
  other v2: 53.016,11.516 54.531,11.518 56.055,11.518 57.452,11.518 58.849,11.518 53.016,13.04 54.531,13.042 56.055,13.042 57.452,13.042 58.849,13.042 53.016,14.564 54.531,14.566 56.055,14.566 57.452,14.566 58.849,14.566 53.016,16.088 54.531,16.09 56.055,16.09 57.452,16.09 58.849,16.09 53.016,17.612 54.531,17.614 56.055,17.614 57.452,17.614 58.849,17.614
PV_IN_B4: C35_B4.2 C36_B4.1 C37_B4.2 R4_B4.1 R53_B4.2 SP1_B4.SP U6_B4.8 U16_B4.8 | length 18
  Top Layer w0.203: U16_B4.8@87.784,32.775 87.867,32.858 88.608,32.858 89,33.25 89,36.679 88.429,37.25 U6_B4.8@87.949,37.25
  Top Layer w0.3: R4_B4.1@80.5,33.469 80.5,35 81.25,35.75 v1(81.75,35.75) R53_B4.2@83.25,35.75 ; v1(86.5,32.718) 86.528,32.747 87.756,32.747 U16_B4.8@87.784,32.775
  Bottom Layer w0.3: v1(81.75,35.75) 84.762,32.738 86.481,32.738 v1(86.5,32.718)
  other v2: 75.016,11.516 76.531,11.518 78.055,11.518 79.452,11.518 80.849,11.518 75.016,13.04 76.531,13.042 78.055,13.042 79.452,13.042 80.849,13.042 75.016,14.564 76.531,14.566 78.055,14.566 79.452,14.566 80.849,14.566 75.016,16.088 76.531,16.09 78.055,16.09 79.452,16.09 80.849,16.09 75.016,17.612 76.531,17.614 78.055,17.614 79.452,17.614 80.849,17.614
PV_IN_B5: C35_B5.2 C36_B5.1 C37_B5.2 R4_B5.1 R53_B5.2 SP1_B5.SP U6_B5.8 U16_B5.8 | length 18
  Top Layer w0.203: U16_B5.8@109.784,32.775 109.867,32.858 110.608,32.858 111,33.25 111,36.679 110.429,37.25 U6_B5.8@109.949,37.25
  Top Layer w0.3: R4_B5.1@102.5,33.469 102.5,35 103.25,35.75 v1(103.75,35.75) R53_B5.2@105.25,35.75 ; v1(108.5,32.718) 108.528,32.747 109.756,32.747 U16_B5.8@109.784,32.775
  Bottom Layer w0.3: v1(103.75,35.75) 106.762,32.738 108.481,32.738 v1(108.5,32.718)
  other v2: 97.016,11.516 98.531,11.518 100.055,11.518 101.452,11.518 102.849,11.518 97.016,13.04 98.531,13.042 100.055,13.042 101.452,13.042 102.849,13.042 97.016,14.564 98.531,14.566 100.055,14.566 101.452,14.566 102.849,14.566 97.016,16.088 98.531,16.09 100.055,16.09 101.452,16.09 102.849,16.09 97.016,17.612 98.531,17.614 100.055,17.614 101.452,17.614 102.849,17.614
PV_OUT_B1: C29_B1.1 C30_B1.1 C31_B1.2 C32_B1.2 C33_B1.2 C34_B1.2 R5_B1.1 R55_B1.2 U7_B1.7 | length 4.6
  Top Layer w0.3: R5_B1.1@16.5,91.5 16.5,93 17.25,93.75 R55_B1.2@19.25,93.75
PV_OUT_B2: C29_B2.1 C30_B2.1 C31_B2.2 C32_B2.2 C33_B2.2 C34_B2.2 R5_B2.1 R55_B2.2 U7_B2.7 | length 4.6
  Top Layer w0.3: R5_B2.1@38.5,91.5 38.5,93 39.25,93.75 R55_B2.2@41.25,93.75
PV_OUT_B3: C29_B3.1 C30_B3.1 C31_B3.2 C32_B3.2 C33_B3.2 C34_B3.2 R5_B3.1 R55_B3.2 U7_B3.7 | length 4.6
  Top Layer w0.3: R5_B3.1@60.5,91.5 60.5,93 61.25,93.75 R55_B3.2@63.25,93.75
PV_OUT_B4: C29_B4.1 C30_B4.1 C31_B4.2 C32_B4.2 C33_B4.2 C34_B4.2 R5_B4.1 R55_B4.2 U7_B4.7 | length 4.6
  Top Layer w0.3: R5_B4.1@82.5,91.5 82.5,93 83.25,93.75 R55_B4.2@85.25,93.75
PV_OUT_B5: C29_B5.1 C30_B5.1 C31_B5.2 C32_B5.2 C33_B5.2 C34_B5.2 R5_B5.1 R55_B5.2 U7_B5.7 | length 4.6
  Top Layer w0.3: R5_B5.1@104.5,91.5 104.5,93 105.25,93.75 R55_B5.2@107.25,93.75
RENUM: R40.1 U2.38 | length 17
  Top Layer w0.203: v1(-24.75,98) -24.667,98.083 -24.667,98.333 -24.425,98.575 U2.38@-23.25,98.575
  Top Layer w0.3: v1(-29.25,107.75) -29.25,107.725 -28,106.475 R40.1@-28,106.375
  Layer 2 w0.3: v1(-29.25,107.75) -30,107 -30,103 -27.25,100.25 -25.5,100.25 -24.75,99.5 v1(-24.75,98)
SCL1: R49.1 R78.2 U1.136 U6_B1.5 U6_B2.5 U6_B3.5 U6_B4.5 U6_B5.5 | length 233.1
  Top Layer w0.203: U6_B1.5@26.051,38.25 27.133,38.25 27.383,38.5 v1(27.5,38.5) ; U6_B2.5@48.051,38.25 48.932,38.25 49.227,38.545 v1(49.295,38.545) ; U6_B3.5@70.051,38.25 70.932,38.25 71.182,38.5 v1(71.25,38.5) ; U6_B4.5@92.051,38.25 92.932,38.25 93.182,38.5 v1(93.25,38.5) ; U6_B5.5@114.051,38.25 114.932,38.25 115.182,38.5 v1(115.25,38.5)
  Top Layer w0.3: R49.1@-26.25,26 R78.2@-27.75,26 -27.85,26 -28.1,25.75 -28.1,25.65 -28.25,25.5 -28.25,21.082 U1.136@-26.022,18.854 -24.732,17.564 v1(-24.064,17.564)
  Layer 2 w0.3: v1(-24.064,17.564) -24,17.5 -14.409,17.5 -10.409,21.5 -6,21.5 -1.5,26 30.5,26 ; v1(27.5,38.5) 28.75,38.5 30.5,36.75 30.5,26 ; v1(49.295,38.545) 49.341,38.5 50.659,38.5 52.5,36.659 52.5,26 ; v1(71.25,38.5) 73.25,38.5 74.5,37.25 74.5,26 ; v1(93.25,38.5) 94.75,38.5 96.5,36.75 96.5,26 ; v1(115.25,38.5) 115.25,36.75 117.344,34.655 117.344,31.52 111.824,26 96.5,26 ; 30.5,26 52.5,26 ; 52.5,26 74.5,26 ; 74.5,26 96.5,26
SCL2: J5.2 R11_B2.2 R11_B4.2 R78.1 R80.1 U1.11 U5_B1.5 U5_B2.5 U5_B3.5 U5_B4.5 U5_B5.5 | length 260.4
  Top Layer w0.203: U5_B1.5@28.051,96.5 28.5,96.5 29.5,97.5 v1(29.5,100) ; U5_B2.5@50.051,96.5 50.5,96.5 51.5,97.5 v1(51.5,100) ; U5_B3.5@72.051,96.5 72.5,96.5 73.5,97.5 v1(73.5,100) ; U5_B4.5@94.051,96.5 94.072,96.521 94.654,96.521 95.5,97.367 95.5,98.683 ; R11_B4.2@94.5,98.25 94.5,98.35 94.798,98.648 95.465,98.648 95.5,98.683 ; v1(95.5,100) 95.5,98.683 ; U5_B5.5@116.051,96.5 116.5,96.5 117.5,97.5 v1(117.5,100)
  Top Layer w0.3: R80.1@-30,6.5 v1(-28.75,7.75) -27.403,7.75 U1.11@-25.315,9.839 ; R78.1@-27.75,27.5 -27.65,27.5 -26.4,28.75 v1(-25,28.75) ; v1(-7,51.75) -6,51.75 -3.75,54 -2.456,54 -2.28,53.824 -2.28,53.03 J5.2@-2,52.75 ; U5_B2.5@50.051,96.5 50.051,97.106 50.25,97.305 50.25,98 R11_B2.2@50.5,98.25
  Layer 2 w0.3: v1(-28.75,7.75) -30.25,9.25 -30.25,23.5 -28.5,25.25 v1(-25,28.75) -25,29.75 -24.844,29.906 -24.844,30.746 -20.41,35.18 -19.229,35.18 -7,47.409 v1(-7,51.75) -7,85.25 7.75,100 v1(29.5,100) v1(51.5,100) v1(73.5,100) v1(95.5,100) v1(117.5,100)
SDA1: R12_B2.1 R12_B4.1 R79.2 R86_B5.1 R95.1 U1.137 U6_B1.4 U6_B2.4 U6_B3.4 U6_B4.4 U6_B5.4 | length 256.5
  Top Layer w0.203: U6_B1.4@26.051,37.75 v1(28,37.75) ; U6_B2.4@48.051,37.75 48.072,37.771 49.725,37.771 v1(49.75,37.796) ; U6_B3.4@70.051,37.75 70.057,37.756 71.71,37.756 v1(71.75,37.796) ; U6_B4.4@92.051,37.75 92.057,37.756 93.71,37.756 v1(93.75,37.796) ; U6_B5.4@114.051,37.75 115.626,37.75 115.922,38.046 v1(115.961,38.046)
  Top Layer w0.3: R95.1@-30.75,26 R79.2@-29.25,26 ; R79.2@-29.15,26 -28.9,25.75 -28.9,21.025 U1.137@-26.375,18.501 -26.375,18.461 -24.75,16.836 v1(-24.75,16.75) ; v1(29,25) v1(29,27) ; R12_B2.1@49,41.25 v1(49,42.25) ; v1(51,25.075) v1(51,27) ; v1(73,25) v1(73,27) ; v1(92.5,42.25) 92.564,42.186 92.564,41.686 92.65,41.6 92.65,41.5 92.9,41.25 R12_B4.1@93,41.25 ; v1(95,25) v1@95,27 ; R86_B5.1@116.5,41.25 116.6,41.25 116.85,41.5 116.85,42.009 117,42.159 v1(117,42.25)
  Layer 2 w0.3: v1(-24.75,16.75) -14.5,16.75 -10.25,21 -5.5,21 -1.5,25 v1(29,25) 29.037,25.037 50.963,25.037 v1(51,25.075) 51.037,25.037 72.963,25.037 v1(73,25) v1(95,25) 112,25 118,31 118,35 115.905,37.095 115.905,37.99 v1(115.961,38.046) 115.961,41.211 v1(117,42.25) ; v1(28,37.75) 28.018,37.732 28.767,37.732 30,36.5 30,28 v1(29,27) ; v1(49,42.25) 49,42.159 48.25,41.409 48.25,38.5 48.89,37.86 49.686,37.86 v1(49.75,37.796) 49.798,37.844 50.746,37.844 52,36.591 52,28 v1(51,27) ; v1(71.75,37.796) 72.954,37.796 74,36.75 74,28 v1(73,27) ; v1(92.5,42.25) 92.5,38.25 92.89,37.86 93.686,37.86 v1(93.75,37.796) 94.698,37.796 96,36.494 96,28.006 v1(95.013,27.019)
SDA2: J5.3 R13_B5.2 R79.1 R81.1 U1.10 U5_B1.4 U5_B2.4 U5_B3.4 U5_B4.4 U5_B5.4 | length 262.6
  Top Layer w0.203: U5_B1.4@28.051,96 29,96 30.5,97.5 v1(30.5,99) ; U5_B2.4@50.051,96 51,96 52.5,97.5 v1(52.5,99) ; U5_B3.4@72.051,96 73.5,96 74.5,97 v1(74.5,99) ; U5_B4.4@94.051,96 94.057,95.994 95.063,95.994 96.5,97.431 v1(96.5,99) ; U5_B5.4@116.051,96 116.057,96.006 117.494,96.006 118.5,97.012 v1(118.5,99)
  Top Layer w0.3: R81.1@-30.97,7.53 -29.75,8.75 v1(-28.75,8.75) -27.11,8.75 U1.10@-25.668,10.192 ; R79.1@-29.25,27.5 -29.15,27.5 -27.155,29.495 -22.755,29.495 v1(-22.75,29.5) ; v1(-6,52.75) -4,54.75 -2,54.75 -1,53.75 J5.3@-1,52.75 ; v1(111.25,99) 111.314,98.936 111.664,98.936 112.25,98.35 R13_B5.2@112.25,98.25
  Layer 2 w0.3: v1(-28.75,8.75) -29.5,9.5 -29.5,22.75 v1(-22.75,29.5) -6,46.25 v1(-6,52.75) -6,85.25 7.75,99 v1(30.5,99) v1(52.5,99) v1(74.5,99) v1(96.5,99) v1(111.25,99) v1(118.5,99)
T_CLK: P2.4 U1.109 U2.15 U2.26 | length 86.2
  Top Layer w0.203: P2.4@-26.25,42.52 -26.23,42.5 v1(-24.5,42.5) ; v1(-17.5,29.25) -17.413,29.25 -16.663,28.5 U1.109@-16.5,28.5 ; U2.26@-16.95,100.375 -16.95,98.567 -16.75,98.367 v1(-16.75,98.25) ; U2.15@-15.15,94.575 -15.131,94.556 -13.556,94.556 v1(-13.5,94.5)
  Layer 2 w0.203: v1(-24.5,42.5) -21.25,45.75 -21.25,75.75 -11.75,85.25 -11.75,89.75 -13.5,91.5 v1(-13.5,94.5) -16.75,97.75 v1(-16.75,98.25)
  Bottom Layer w0.203: v1(-24.5,42.5) -22,40 -22,33.728 -17.522,29.25 v1(-17.5,29.25)
T_DIO: P2.2 R36.2 U1.105 U2.27 | length 91
  Top Layer w0.203: P2.2@-26.25,43.79 -26.21,43.75 v1(-24.5,43.75) ; v1(-17.75,97) -17.667,97.083 -17.667,98.775 -17.468,98.974 -17.468,100.356 U2.27@-17.45,100.375 -17.45,102.35 -17.75,102.65 R36.2@-17.75,102.75 ; U1.105@-12.764,27.34 -12.764,27.361 -12.083,28.042 -12.083,28.417 v1(-12,28.5)
  Layer 2 w0.203: v1(-24.5,43.75) -21.75,46.5 -21.75,76 -12.25,85.5 -12.25,89.637 -14.11,91.497 -14.11,93.36 v1(-17.75,97)
  Bottom Layer w0.203: v1(-24.5,43.75) -24.5,43.272 -21.5,40.272 -21.5,36.75 -13.25,28.5 v1(-12,28.5)
T_RST: C84.2 D8.1 P2.10 R82.2 S1.1 U1.25 U2.18 | length 114.7
  Top Layer w0.203: C84.2@-32.5,35.15 -32.448,35.15 -31.298,34.001 -31.298,33.698 -30.85,33.25 S1.1@-30.75,33.25 ; S1.1@-30.75,33.35 -29.048,33.35 D8.1@-29,33.398 ; v1(-29,31.25) -29,32 -28.281,32.719 ; D8.1@-29,33.438 -29,33.375 -28.952,33.327 -28.889,33.327 -28.281,32.719 ; R82.2@-27.25,33.75 -27.35,33.75 -27.648,33.452 -27.648,33.352 -28.281,32.719 ; R82.2@-27.15,33.75 -26.25,34.65 P2.10@-26.25,38.71 -26.21,38.75 v1(-24.5,38.75) ; U1.25@-20.25,5 -19.583,5.667 -19.333,5.667 v1(-19.25,5.75) ; U2.18@-15.15,96.075 -15.131,96.057 -13.307,96.057 v1(-13.25,96)
  Layer 2 w0.203: v1(-24.5,38.75) -20.25,43 -20.25,75.25 -10.75,84.75 -10.75,90 -12.5,91.75 -12.5,95.25 v1(-13.25,96)
  Bottom Layer w0.203: v1(-29,31.25) -29,12 -22.75,5.75 v1(-19.25,5.75)
T_SWO: P2.6 R15.2 U2.31 | length 81.4
  Top Layer w0.203: P2.6@-26.25,41.25 v1(-24.5,41.25) -23,39.75 -23,35 -23.664,34.336 -23.664,33.836 R15.2@-23.75,33.75 ; U2.31@-19.45,100.375 -19.45,101.55 v1(-19,102)
  Layer 2 w0.203: v1(-24.5,41.25) -20.75,45 -20.75,75.5 -11.25,85 -11.25,89.75 -12.954,91.454 -12.954,94.726 -13.682,95.454 -16.204,97.976 -16.204,99.204 v1(-19,102)
TDI: P2.8 R14.2 | length 8.9
  Top Layer w0.203: P2.8@-26.25,39.98 -25.972,39.702 -24.452,39.702 -23.75,39 -23.75,36.75 -25.5,35 R14.2@-25.5,33.75
UART_RX: R60.1 U1.116 | length 77
  Top Layer w0.3: v1(-20.25,27) -20.186,26.936 -19.961,26.936 U1.116@-18.951,25.925 ; v1(-19.5,29.25) v1@-19.5,35.75 ; v1(-2.25,93.5) R60.1@-2.25,94.5
  Layer 2 w0.3: v1(-20.25,27) -19.5,27.75 v1(-19.5,29.25) ; v1(-19.5,35.775) -18.906,36.369 -18.906,37.655 -19.25,38 -19.25,74.75 -2.25,91.75 v1(-2.25,93.5)
UART_TX: R59.1 U1.113 | length 74.9
  Top Layer w0.3: v1(-19.5,36.75) -18.75,36 -18.75,27.846 U1.113@-17.89,26.986 ; v1(-3.75,93.5) R59.1@-3.75,94.5
  Layer 2 w0.3: v1(-19.5,36.75) -19.5,36.841 -19.75,37.091 -19.75,75 -3.75,91 v1(-3.75,93.5)